# Allegro board a6321a-eval.brd
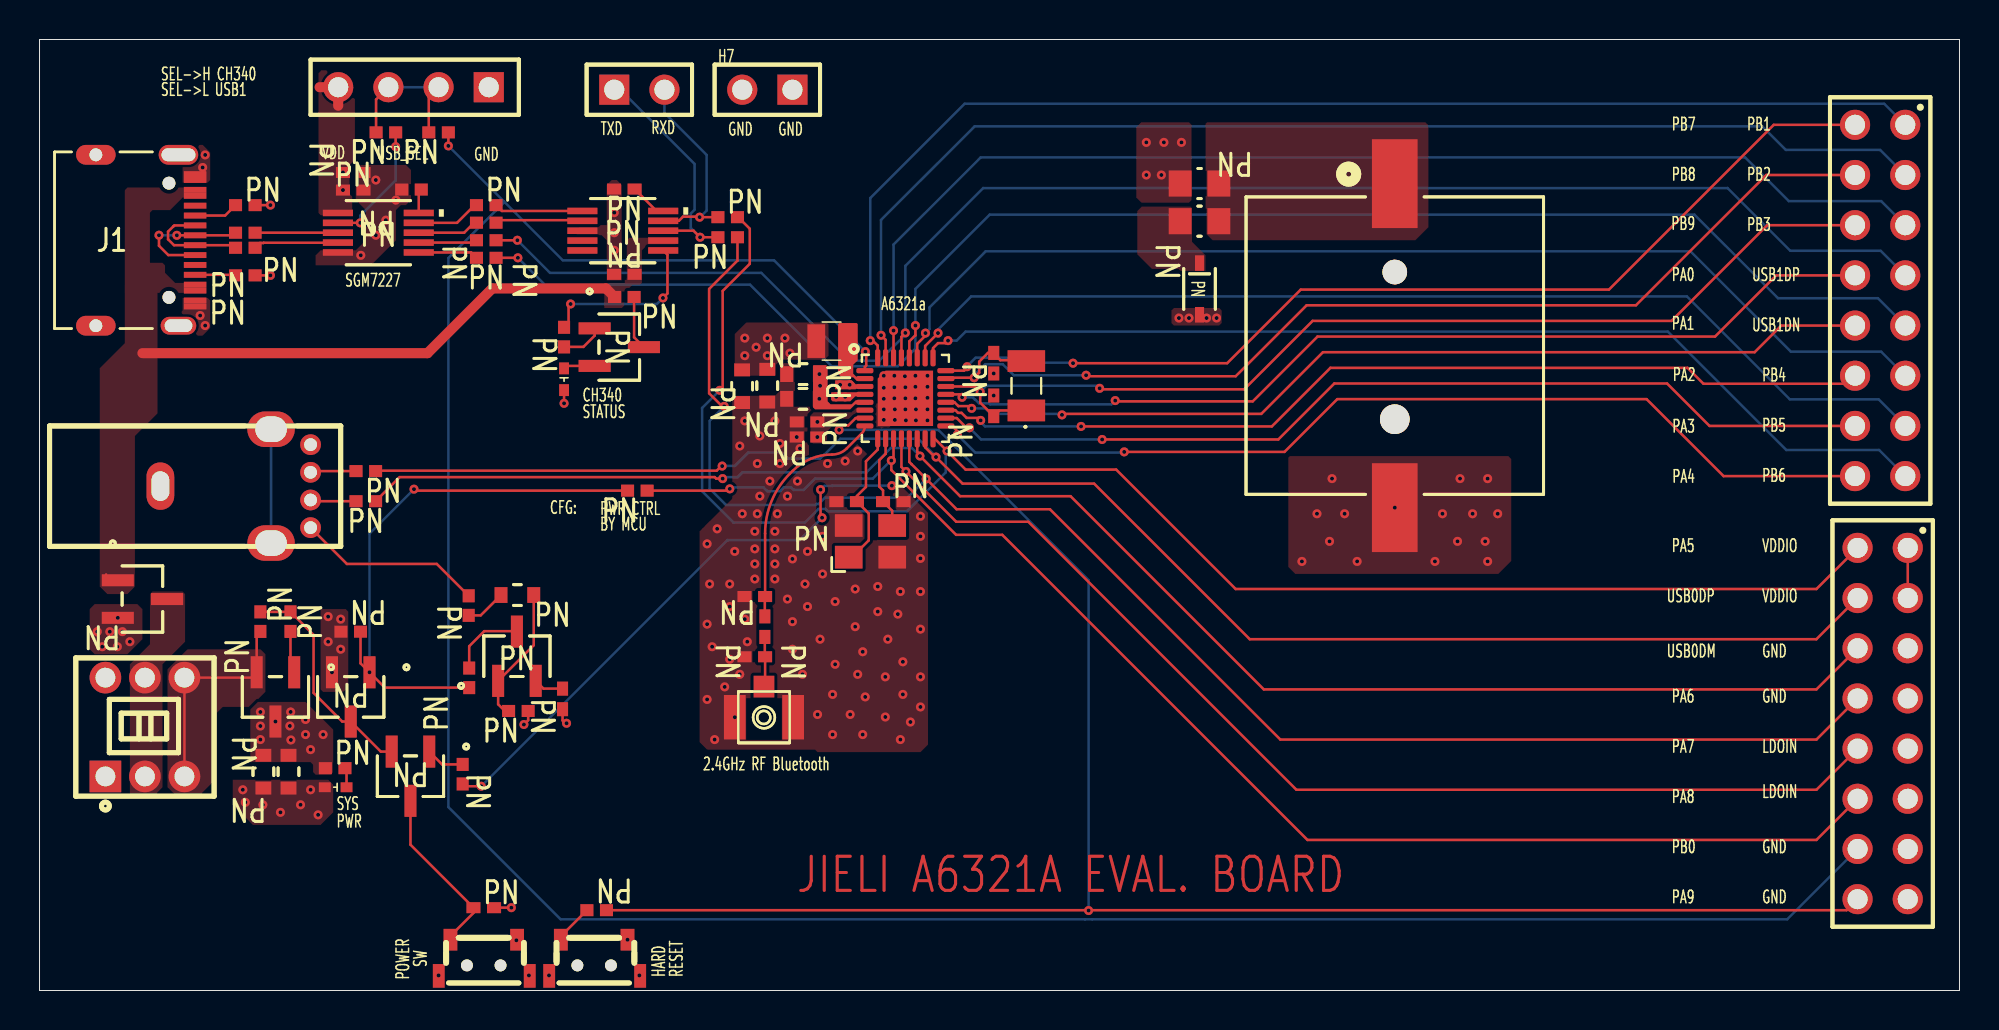
[diagram p0: board, top side]
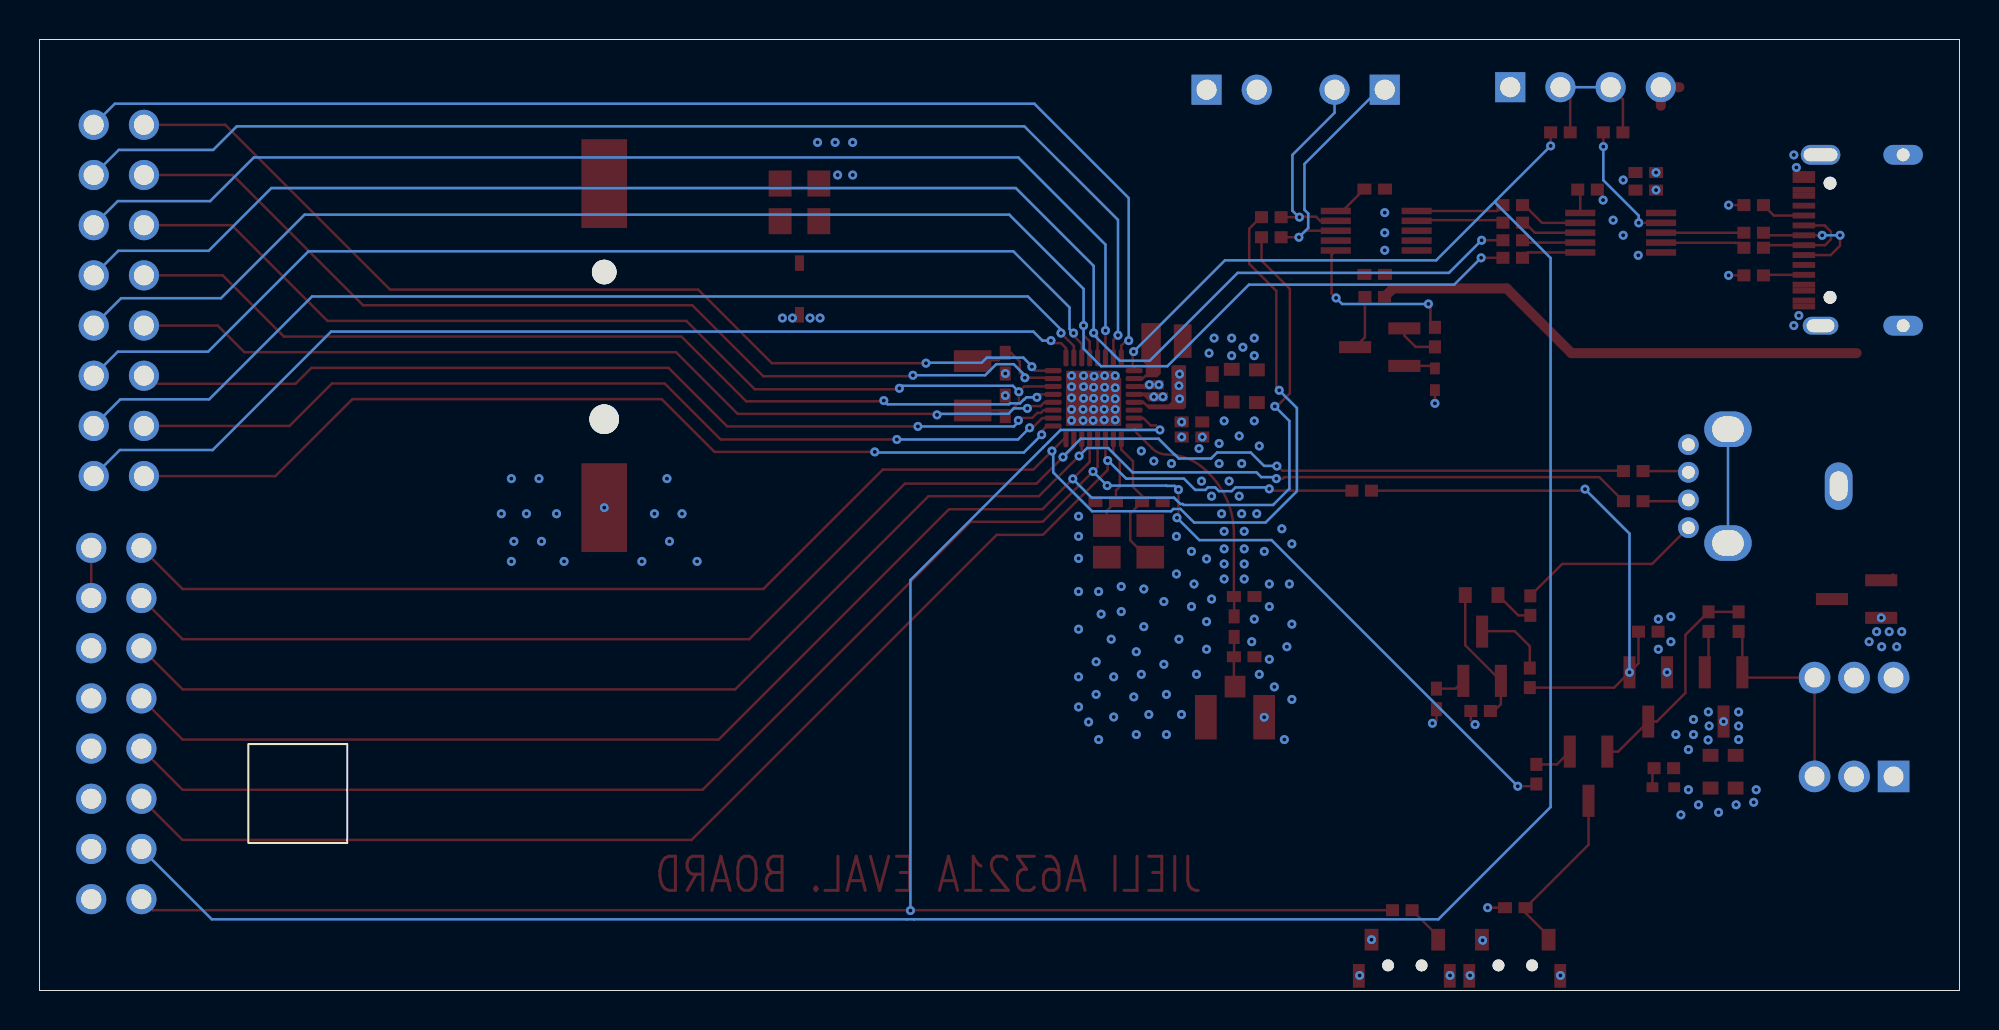
[diagram p1: board, bottom side, seen from below]

Outline 97.16 x 48.13 mm; copper layers: TOP, INNER1, INNER2, BOTTOM. Coordinates in mm from the lower left corner of the outline.
Outline path: 0,48.13 0,0 97.16,0 97.16,48.13 0,48.13

## Design rules (mm)
constraint set DEFAULT: min track width 0.127

## Placement (name value [footprint] x y rotation side)
BT1  LIR1220  [BAT_CR-1220_SOCKET]  68.58 32.64 0 top
C1  12pF(DNP)  [CAP_SMD_MLCC_0402]  40.84 24.74 0 top
C2  12pF(DNP)  [CAP_SMD_MLCC_0402]  43.2 24.74 0 top
C3  12pF(DNP)  [CAP_SMD_MLCC_0402]  48.29 29.59 90 top
C4  12pF(DNP)  [CAP_SMD_MLCC_0402]  48.29 31.75 270 top
C5  4.7uF  [CAP_SMD_MLCC_0402]  29.59 40.56 0 top
C6  4.7uF  [CAP_SMD_MLCC_0402]  29.59 36.25 180 top
C7  10uF  [CAP_SMD_MLCC_0603]  38.64 31.2 180 top
C8  10uF  [CAP_SMD_MLCC_0603]  38.63 29.95 180 top
C9  4.7uF  [CAP_SMD_MLCC_0402]  38.84 28.78 180 top
C10  4.7uF  [CAP_SMD_MLCC_0402]  38.84 28.01 180 top
C11  100nF  [CAP_SMD_MLCC_0402]  22.48 4.19 0 top
C12  10uF  [CAP_SMD_MLCC_0603]  24.18 20.02 0 top
C13  10uF  [CAP_SMD_MLCC_0603]  11.33 11.07 270 top
C14  10uF  [CAP_SMD_MLCC_0603]  12.6 11.07 270 top
C15  10uF  [CAP_SMD_MLCC_0603]  35.55 30.59 270 top
C16  10uF  [CAP_SMD_MLCC_0603]  36.82 30.61 270 top
C17  DNP  [CAP_SMD_MLCC_0402]  36.7 18.41 270 top
C18  NP0  [CAP_SMD_MLCC_0402]  36.2 16.89 0 top
C19  DNP  [CAP_SMD_MLCC_0402]  36.2 19.94 180 top
C20  4.7uF  [CAP_SMD_MLCC_0402]  26.47 14.76 270 top
C21  4.7uF  [CAP_SMD_MLCC_0402]  15.88 41.4 0 top
C22  4.7uF  [CAP_SMD_MLCC_0402]  15.88 40.51 0 top
D1  1N5819  [SOD-323]  58.7 35.51 270 top
D3  RED  [LED_SMD_0402_YX]  26.54 30.94 90 top
D4  RED  [LED_SMD_0402_YX]  14.99 10.29 0 top
D5  BAT54C/SOT  [SOT-23-3-M]  5.21 19.81 270 top
D6  BAT54C/SOT  [SOT-23-3-M]  18.77 10.85 180 top
H2  TYPE-A  [USB_FEMALE_SIDE_SHORT_TYPEA]  13.72 25.53 90 top
H3  Header 1x4  [HEADER_1X4_2R54_POLAR]  18.92 45.72 0 top
H4  Header 1x2  [HEADER_1X2_2R54_POLAR]  30.35 45.59 180 top
H5  Header 2x8  [HEADER_2X8_2R54]  93.14 34.92 270 top
H6  Header 2x8  [HEADER_2X8_2R54]  93.27 13.51 270 top
H7  Header 1x2  [HEADER_1X2_2R54_POLAR]  36.83 45.59 0 top
J1  Type-C 16 Pin  [USB_TYPEC_THC_16PIN]  7.62 37.97 270 top
J2  IPX Connector  [IPEX_3PIN]  36.66 13.83 180 top
J3  SW-SELFLOCK  [SW_SELF-LOCK_7X7MM]  5.33 13.34 0 top
L1  2.2uH  [IND_SMD_POW_CR252012]  40.11 32.87 90 top
Q1  S8050  [SOT-23-3-M]  29.34 32.56 270 top
Q2  AO3401  [SOT-23-3-M]  11.94 14.86 180 top
Q3  S8050  [SOT-23-3-M]  15.75 14.86 180 top
Q4  S8050  [SOT-23-3-M]  24.16 16.92 0 top
R1  1K(DNP)  [RES_SMD_0402-M]  28.19 4.06 180 top
R2  22R  [RES_SMD_0402-M]  16.51 24.77 0 top
R3  22R  [RES_SMD_0402-M]  16.51 26.29 0 top
R5  0R(DNP)  [RES_SMD_0805-M]  58.7 40.84 180 top
R6  0R(DNP)  [RES_SMD_0805-M]  58.7 38.94 0 top
R7  10k  [RES_SMD_0402-M]  18.82 40.54 180 top
R8  0R  [RES_SMD_0402-M]  10.41 37.59 0 top
R9  0R  [RES_SMD_0402-M]  10.41 38.35 0 top
R10  5.1k  [RES_SMD_0402-M]  10.41 39.75 0 top
R11  5.1k  [RES_SMD_0402-M]  10.41 36.2 0 top
R12  10k  [RES_SMD_0402-M]  29.59 35.1 0 top
R13  TBD  [RES_SMD_0402-M]  26.54 33.07 270 top
R14  10k  [RES_SMD_0402-M]  17.53 43.43 0 top
R15  10k  [RES_SMD_0402-M]  14.96 11.25 0 top
R16  TBD  [RES_SMD_0402-M]  34.82 38.13 0 top
R17  TBD  [RES_SMD_0402-M]  34.82 39.14 0 top
R18  0R  [RES_SMD_0402-M]  20.19 43.43 0 top
R19  0R  [RES_SMD_0402-M]  12.7 18.67 90 top
R20  10M  [RES_SMD_0402-M]  11.18 18.67 90 top
R21  10M  [RES_SMD_0402-M]  15.75 18.16 180 top
R22  100R  [RES_SMD_0402-M]  21.74 15.82 90 top
R23  10R  [RES_SMD_0402-M]  21.72 19.48 270 top
R24  10M  [RES_SMD_0402-M]  24.23 14.15 0 top
R25  0R  [RES_SMD_0402-M]  22.61 37.97 0 top
R26  0R  [RES_SMD_0402-M]  22.61 39.75 0 top
R27  0R  [RES_SMD_0402-M]  22.61 37.08 0 top
R28  0R  [RES_SMD_0402-M]  22.61 38.86 0 top
R29  0R  [RES_SMD_0402-M]  21.41 10.95 270 top
R30  0R  [RES_SMD_0402-M]  30.25 25.3 0 top
SW1  2345 Side Button  [BUTTON_SMD_SIDE_2435]  28.07 1.27 0 top
SW2  2345 Side Button  [BUTTON_SMD_SIDE_2435]  22.48 1.27 0 top
U1  AC6321A  [QFN32_4X4]  43.81 29.97 0 top
U2  SGM7227  [MSOP-10]  17.14 38.35 0 top
U3  CH340E  [MSOP-10]  29.51 38.46 0 top
XTAL1  24MHz 10ppm  [CRYSTAL_SMD_3225]  42.05 22.73 0 top
XTAL2  ?Hz  [CRYSTAL_SMD_3215]  49.94 30.61 90 top

## Library data of the parts
BT1 = BATTERY
C1-C6 C9-C11 C17-C22 = CAP-MLCC-0402-100nF-50V-10%-X7R: User Part Number: PN; Tolerance: 10%; tolerance: 10%
C7 C8 C12-C16 = CAP-MLCC-0603-10uF-10V-10%-X5R: User Part Number: PN; Tolerance: 10%; tolerance: 10%
D1 = DIODE-?V-?A-F?V-ARBTY: User Part Number: PN; Tolerance: TOL
D3 D4 = LED-ARBTY-COL-SIZE
D5 D6 = BAT54C/SOT: User Part Number: PN; Tolerance: TOL
H2 = USB-TYPEA-VERTICAL-SHORT
H3 = HEADER 1x4
H4 H7 = HEADER 1x2
H5 H6 = HEADER 2x8
J1 = TYPE-C_16_CON
J2 = IPEX_3PIN
J3 = SW-SELFLOCK
L1 = IND-?H-?A-?%-ARBTY: tolerance: ?%
Q1 Q3 Q4 = NPN-S8050-0.5A-J3Y: User Part Number: PN; Tolerance: TOL
Q2 = PMOS-AO3401-30V-4A: User Part Number: PN; Tolerance: TOL
R1-R3 R7-R30 = RES-0402-?R-1%-1/16W: User Part Number: PN; Tolerance: 1%; tolerance: 1%
R5 R6 = RES-0805-?R-1%-1/8W: User Part Number: PN; Tolerance: 1%; tolerance: 1%
SW1 SW2 = BUTTON_2435_SIDE
U1 = JL-A6321A
U2 = SGM7227: User Part Number: PN; Tolerance: TOL
U3 = CH340E: User Part Number: PN; Tolerance: TOL
XTAL1 = CRYSTAL-3225-?Hz
XTAL2 = CRYSTAL-3215-?Hz

## Footprints (pads in the part's own frame, mm; a bottom-side part is the same pattern mirrored in y, then rotated)
BAT_CR-1220_SOCKET
  round 1.245 hole 1.245: (0,3.725)
  round 1.499 hole 1.499: (0,-3.725)
  rect 2.311x4.496 smd: 1(0,8.2) 2(0,-8.2)
BUTTON_SMD_SIDE_2435
  round 0.6 hole 0.6 unplated: (-0.85,0) (0.85,0)
  rect 0.7x1.1 smd: 1(-1.687,1.3) 2(1.687,1.3)
  rect 0.6x1.2 smd: 3(2.327,-0.531) 4(-2.276,-0.531)
CAP_SMD_MLCC_0402
  rect 0.711x0.559 smd: 1(-0.521,0) 2(0.521,0)
CAP_SMD_MLCC_0603
  rect 0.656x0.8 smd: 1(-0.828,0) 2(0.828,0)
CRYSTAL_SMD_3215
  rect 1.1x1.9 smd: 1(-1.25,0) 2(1.25,0)
CRYSTAL_SMD_3225
  rect 1.4x1.15 smd: 1(-1.1,-0.8) 2(1.1,-0.8) 3(1.1,0.8) 4(-1.1,0.8)
HEADER_1X2_2R54_POLAR
  round 1.524 hole 1.016: 1(-1.27,0)
  rect 1.524x1.524 hole 1.016: 2(1.27,0)
HEADER_1X4_2R54_POLAR
  round 1.524 hole 1.016: 1(-3.81,0) 2(-1.27,0) 3(1.27,0)
  rect 1.524x1.524 hole 1.016: 4(3.81,0)
HEADER_2X8_2R54
  round 1.524 hole 1.016: 1(-8.89,-1.27) 2(-6.35,-1.27) 3(-3.81,-1.27) 4(-1.27,-1.27) 5(1.27,-1.27) 6(3.81,-1.27) 7(6.35,-1.27) 8(8.89,-1.27) 9(8.89,1.27) 10(6.35,1.27) 11(3.81,1.27) 12(1.27,1.27) 13(-1.27,1.27) 14(-3.81,1.27) 15(-6.35,1.27) 16(-8.89,1.27)
IND_SMD_POW_CR252012
  rect 1.7x0.9 smd: 1(0,0.8) 2(0,-0.8)
IPEX_3PIN
  rect 1.1x2.25 smd: 1(-1.475,0) 2(1.475,0)
  rect 1.05x1.1 smd: 3(0,-1.55)
LED_SMD_0402_YX
  rect 0.6x0.5 smd: A(0.55,0) C(-0.55,0)
MSOP-10
  rect 1.524x0.33 smd: 1(-2.045,1) 2(-2.045,0.5) 3(-2.045,0) 4(-2.045,-0.5) 5(-2.045,-1) 6(2.045,-1) 7(2.045,-0.5) 8(2.045,0) 9(2.045,0.5) 10(2.045,1)
QFN32_4X4
  custom 0.86x0.26 smd: 1(-2.05,1.4) 2(-2.05,1) 3(-2.05,0.6) 4(-2.05,0.2) 5(-2.05,-0.2) 6(-2.05,-0.6) 7(-2.05,-1) 8(-2.05,-1.4) 17(2.05,-1.4) 18(2.05,-1) 19(2.05,-0.6) 20(2.05,-0.2) 21(2.05,0.2) 22(2.05,0.6) 23(2.05,1) 24(2.05,1.4)
  custom 0.26x0.86 smd: 9(-1.4,-2.05) 10(-1,-2.05) 11(-0.6,-2.05) 12(-0.2,-2.05) 13(0.2,-2.05) 14(0.6,-2.05) 15(1,-2.05) 16(1.4,-2.05) 25(1.4,2.05) 26(1,2.05) 27(0.6,2.05) 28(0.2,2.05) 29(-0.2,2.05) 30(-0.6,2.05) 31(-1,2.05) 32(-1.4,2.05)
  custom 2.8x2.8 smd: 33(0,0)
RES_SMD_0402-M
  rect 0.66x0.61 smd: 1(-0.495,0) 2(0.495,0)
RES_SMD_0805-M
  rect 1.159x1.321 smd: 1(-0.979,0) 2(0.979,0)
SOD-323
  rect 0.787x0.457 smd: 1(-1.308,0) 2(1.308,0)
SOT-23-3-M
  rect 0.61x1.626 smd: 1(-0.95,-1.246) 2(0.95,-1.246) 3(0,1.246)
SW_SELF-LOCK_7X7MM
  rect 1.6x1.6 hole 1: 1(-2,-2.5)
  round 1.6 hole 1: 2(0,-2.5) 3(2,-2.5) 4(-2,2.5) 5(0,2.5) 6(2,2.5)
USB_FEMALE_SIDE_SHORT_TYPEA
  round 1.05 hole 0.65: 1(-2.1,0) 2(-0.7,0) 3(0.7,0) 4(2.1,0)
  oval 1.8x2.4 hole 1.3x1.6: 5(-2.88,2) 6(2.88,2)
  oval 2.4x1.4 hole 1.5x0.9: 7(0,7.6)
USB_TYPEC_THC_16PIN
  round 0.65 hole 0.65 unplated: (-2.89,-1.07) (2.89,-1.07)
  rect 0.3x1.14 smd: A1(-3.35,0.254) A4(-2.55,0.254) A5(-1.25,0.254) A6(-0.25,0.254) A7(0.25,0.254) A8(1.25,0.254) A9(2.55,0.254) A12(3.35,0.254) B1(3.05,0.254) B4(2.25,0.254) B5(1.75,0.254) B6(0.75,0.254) B7(-0.75,0.254) B8(-1.75,0.254) B9(-2.25,0.254) B12(-3.05,0.254)
  oval 1x2 hole 0.65x1.72: S1(-4.325,-0.59)
  oval 0.9x1.8 hole 0.65x1.4: S2(4.325,-0.59)
  oval 1x2 hole 0.65: S3(-4.325,-4.77) S4(4.325,-4.77)

## Nets
GND: BT1.2(-) C1.1 C2.2 C3.2 C4.2 C5.1 C6.2 C7.2 C8.2 C9.2 C10.2 C11.2 C13.2 C14.2 C15.2 C16.2 C18.1 C19.2 C20.2 C21.2 C22.2 D3.C D4.C H2.4 H2.5 H2.6 H2.7 H3.4 H6.9 H6.10 H6.13 H6.14 H7.1 H7.2 J1.A1 J1.A12 J1.B1 J1.B12 J1.S1 J1.S2 J1.S3 J1.S4 J2.1 J2.2 Q3.2(E) R7.2 R10.2 R11.2 R21.2 R24.2 SW1.2 SW1.3 SW1.4 SW2.2 SW2.3 SW2.4 U1.33 U2.5 U3.3 XTAL1.2 XTAL1.4
VBAT: D1.2 U1.3
VBAT_COIN: BT1.1 R5.1 R6.2
VBUS_4V5: D5.2(C2) H2.1(V+) R23.1
VBUS_5V: C6.1 D5.1 J1.A4 J1.A9 J1.B4 J1.B9(VBUS_B#B9) R12.1 U3.7(VCC)
VDDIO: C7.1 C8.1 C21.1 C22.1 H3.1 H6.15 H6.16 R5.2 U1.5(VDDIO) U2.1(VCC)
BT_AVDD: C9.1 C10.1 C15.1 C16.1 L1.1 U1.6
BT_RF: C17.1 C19.1 U1.8
BTOSCI: C1.2 U1.9 XTAL1.1
BTOSCO: C2.1 U1.10 XTAL1.3
CH340_DM: R28.2 U3.2
CH340_DP: R26.2 U3.1
CH340_RXD: H4.1 R17.1 U3.9
CH340_TXD: H4.2 R16.1 U3.8
LDOIN: C13.1 C14.1 H6.11 H6.12 Q2.3 R15.1 U1.4
PA0: H5.4 U1.21
PA1: H5.5 U1.20
PA2: H5.6 U1.19
PA3: H5.7 U1.18
PA4: H5.8 U1.17
PA5: H6.1 R17.2 U1.16
PA6: H6.4 R16.2 U1.13
PA7: H6.5 R29.2 U1.12
PA8: H6.6 R30.2 U1.11
PA9: H6.8 R1.1 U1.7
PB0: H6.7 R18.2 U1.1
PB1: H5.16 U1.32
PB2: H5.15 U1.31
PB3: H5.14 U1.30
PB4: H5.11 U1.27
PB5: H5.10 U1.26
PB6: H5.9 U1.25
PB7: H5.1 U1.24
PB8: C4.1 H5.2 U1.23 XTAL2.2
PB9: C3.1 H5.3 U1.22 XTAL2.1
PWR_CTRL: Q3.1 R21.1 R22.1 R30.1
PWR_DETCT: D6.1 R29.1
SW: L1.2 U1.2
USB0DM: H6.3 R2.2 U1.14
USB0DP: H6.2 R3.2 U1.15
USB1DM: H5.12 R27.2 U1.28
USB1DP: H5.13 R25.2 U1.29
USB_DUPLEX1_DM: R8.2 U2.4
USB_DUPLEX1_DP: R9.2 U2.3
USB_SEL: H3.2 H3.3 R14.1 R18.1
N03414: R1.2 SW1.1
N03782: H2.2 R2.1
N03786: H2.3 R3.1
N07052: D1.1(K) R6.1
N07391: R7.1 U2.10
N08245: J1.A5 R10.1
N08312: J1.A6 J1.B6 R9.1
N08349: J1.A7 J1.B7 R8.1
N09487: J1.B5 R11.1
N10980: R14.2 U2.2
N11301: C5.2 U3.10
N12450: Q1.3 R12.2
N12671: D3.A Q1.2(E)
N13607: Q1.1 R13.2
N13611: R13.1 U3.6
N16887: D4.A R15.2
N23891: J3.3 J3.6 Q2.2(S) R20.1
N23993: D6.2(C2) Q3.3 R19.2 R20.2
N24001: Q2.1 R19.1
N25149: C11.1 D6.3 SW2.1
N26855: C12.2 Q4.1 R24.1
N27586: C12.1 R23.2
N31213: R26.1 U2.9
N31217: R25.1 U2.7
N31225: R27.1 U2.6
N31229: R28.1 U2.8
N34764: C17.2 C18.2 J2.3(SIG)
N38093: D5.3 J3.2 J3.5
N39913: C20.1 Q4.2(E)
N266131: Q4.3 R22.2

Pads without a net: J1 A8 B8; J3 1 4; U3 4 5

## Via types
v1: diameter 0.457, hole 0.203, TOP to BOTTOM, 263 vias

## Routing (per net, layer and track width the routed paths; a pad name or vN(x,y) marks a point on that pad's centre or on a via; arc(x,y) is an arc through that point)
GND: length 120.2
  TOP w0.127: C11.2 v1(23.88,4.19) ; R10.2 v1(11.68,39.75) ; R24.2 24.73,13.68 v1(24.51,13.46) ; v1(26.67,13.53) 26.67,13.59 26.67,13.59 26.54,13.59 26.47,13.67 C20.2 ; R11.2 v1(11.68,36.2) ; D3.C v1(26.54,29.72)
  INNER1 w0.508: 5.95,33.65 J1.S2 ; J1.S2 8.11,33.65 ; J1.S2 7.03,34.28 ; J1.S2 7.03,33.02 ; 38.1,44.65 H7.2 ; H7.2 39.04,45.59 ; H7.2 37.16,45.59 ; H7.2 38.1,46.53 ; H6.14 95.48,17.32 ; H6.14 94.54,18.26 ; H6.14 94.54,16.38 ; H6.14 93.6,17.32 ; 13.01,27.63 H2.4 ; H2.4 14.42,27.63 ; H2.4 13.72,28.33 ; 5.85,42.3 J1.S1 ; J1.S1 8.21,42.3 ; J1.S1 7.03,42.98 ; J1.S1 7.03,41.62 ; 93.6,7.16 H6.10 ; H6.10 95.48,7.16 ; H6.10 94.54,8.1 ; H6.10 94.54,6.22 ; 22.73,44.78 H3.4 ; H3.4 22.73,46.66 ; H3.4 21.79,45.72 ; H3.4 23.67,45.72 ; 10.34,28.41 H2.6 ; H2.6 11.72,27.33 ; H2.6 13.09,28.41 ; H2.6 11.72,29.49 ; 94.54,3.68 H6.9 ; H6.9 93.6,4.62 ; H6.9 94.54,5.56 ; H6.9 95.48,4.62 ; 94.54,13.84 H6.13 ; H6.13 94.54,15.72 ; H6.13 95.48,14.78 ; H6.13 93.6,14.78 ; 10.34,22.65 H2.5 ; H2.5 11.72,23.72 ; H2.5 11.72,21.57 ; H2.5 13.09,22.65 ; J1.S3 4.03,42.3 ; J1.S3 2.85,42.98 ; J1.S3 2.85,41.62 ; J1.S3 1.67,42.3 ; 34.62,45.59 H7.1 ; H7.1 35.56,44.65 ; H7.1 35.56,46.53 ; H7.1 36.5,45.59 ; 5.24,25.53 H2.7 ; H2.7 6.99,25.53 ; H2.7 6.12,24.15 ; H2.7 6.12,26.9 ; 2.85,32.97 J1.S4 ; J1.S4 1.67,33.65 ; J1.S4 4.03,33.65 ; J1.S4 2.85,34.33
  INNER2 w0.508: H7.1 35.56,46.53 ; H7.1 35.56,44.65 ; H7.1 36.5,45.59 ; H7.1 34.62,45.59 ; J1.S3 4.03,42.3 ; J1.S3 2.85,41.62 ; J1.S3 2.85,42.98 ; J1.S3 1.67,42.3 ; 10.34,28.41 H2.6 ; H2.6 11.72,27.33 ; H2.6 11.72,29.49 ; H2.6 13.09,28.41 ; H3.4 22.73,46.66 ; H3.4 21.79,45.72 ; H3.4 23.67,45.72 ; H3.4 22.73,44.78 ; 38.1,44.65 H7.2 ; H7.2 39.04,45.59 ; H7.2 37.16,45.59 ; H7.2 38.1,46.53 ; 93.6,4.62 H6.9 ; H6.9 94.54,3.68 ; H6.9 95.48,4.62 ; H6.9 94.54,5.56 ; 7.03,41.62 J1.S1 ; J1.S1 8.21,42.3 ; J1.S1 7.03,42.98 ; J1.S1 5.85,42.3 ; 93.6,7.16 H6.10 ; H6.10 95.48,7.16 ; H6.10 94.54,6.22 ; H6.10 94.54,8.1 ; 94.54,13.84 H6.13 ; H6.13 95.48,14.78 ; H6.13 93.6,14.78 ; H6.13 94.54,15.72 ; J1.S2 7.03,34.28 ; J1.S2 7.03,33.02 ; J1.S2 5.95,33.65 ; J1.S2 8.11,33.65 ; 2.85,32.97 J1.S4 ; J1.S4 4.03,33.65 ; J1.S4 2.85,34.33 ; J1.S4 1.67,33.65 ; 6.12,24.15 H2.7 ; H2.7 5.24,25.53 ; H2.7 6.99,25.53 ; H2.7 6.12,26.9 ; H6.14 94.54,18.26 ; H6.14 94.54,16.38 ; H6.14 95.48,17.32 ; H6.14 93.6,17.32 ; H2.4 13.72,28.33 ; H2.4 13.01,27.63 ; H2.4 14.42,27.63
  BOTTOM w0.127: H2.5 H2.6
  vias: v1(8.13,34.16) v1(8.25,41.66) v1(8.38,42.29) v1(8.38,33.66) v1(10.29,10.16) v1(10.41,9.53) v1(11.3,9.4) v1(12.19,9.02) v1(13.21,9.4) v1(13.72,10.16) v1(14.1,8.89) v1(14.6,18.92) v1(14.6,17.65) v1(14.8,16.11) v1(15.24,18.8) v1(15.24,17.27) v1(16.26,37.21) v1(17.02,41.02) v1(17.02,38.23) v1(17.53,38.99) v1(18.03,40) v1(20.19,0.76) v1(24.13,2.54) v1(24.76,0.76) v1(25.78,0.76) v1(29.08,39.37) v1(29.08,38.35) v1(29.08,37.47) v1(29.75,2.57) v1(30.35,0.76) v1(33.78,22.61) v1(33.78,18.54) v1(33.78,14.73) v1(33.91,20.57) v1(34.04,17.4) v1(34.16,12.7) v1(34.29,23.37) v1(34.67,15.37) v1(34.92,20.57) v1(34.92,19.43) v1(34.92,16.76) v1(35.18,22.23) v1(35.18,13.83) v1(35.43,27.56) v1(35.43,16) v1(35.56,24.13) v1(35.69,28.83) v1(35.69,18.8) v1(35.81,17.65) v1(36.2,23.24) v1(36.2,22.35) v1(36.2,21.59) v1(36.2,20.83) v1(36.32,26.67) v1(36.32,24.13) v1(36.45,28.07) v1(36.45,25.02) v1(36.96,25.78) v1(37.21,28.83) v1(37.21,23.24) v1(37.21,22.35) v1(37.21,21.59) v1(37.21,20.83) v1(37.34,24.13) v1(37.46,27.69) v1(37.46,26.67) v1(37.85,25.02) v1(37.85,19.81) v1(38.1,21.84) v1(38.1,18.67) v1(38.1,17.27) v1(38.32,28.01) v1(38.35,25.78) v1(38.48,27.43) v1(38.61,16) v1(38.73,20.57) v1(38.86,22.23) v1(38.86,19.43) v1(39.37,13.97) v1(39.5,17.78) v1(39.62,22.99) v1(39.62,21.08) v1(39.88,26.67) v1(40.13,14.99) v1(40.13,12.95) v1(40.26,19.69) v1(40.26,16.51) v1(40.77,26.8) v1(41.02,13.97) v1(41.27,20.32) v1(41.27,18.41) v1(41.4,27.3) v1(41.4,16) v1(41.66,17.14) v1(41.66,12.95) v1(41.78,14.86) v1(42.42,20.45) v1(42.42,19.18) v1(42.72,31.12) v1(42.72,30.51) v1(42.72,29.95) v1(42.72,29.41) v1(42.72,28.88) v1(42.8,15.88) v1(42.8,13.84) v1(42.93,17.78) v1(43.26,31.12) v1(43.26,30.53) v1(43.26,29.97) v1(43.28,29.41) v1(43.28,28.88) v1(43.43,19.05) v1(43.56,20.19) v1(43.56,12.7) v1(43.69,16.64) v1(43.69,14.99) v1(43.79,31.09) v1(43.81,30.53) v1(43.81,29.97) v1(43.81,29.41) v1(43.84,28.85) v1(44.07,13.59) v1(44.32,31.12) v1(44.32,30.56) v1(44.32,29.97) v1(44.35,29.41) v1(44.35,28.85) v1(44.58,24) v1(44.58,22.99) v1(44.58,21.87) v1(44.58,20.19) v1(44.58,18.29) v1(44.58,15.88) v1(44.58,14.35) v1(44.93,31.12) v1(44.93,30.56) v1(44.93,30) v1(44.93,29.41) v1(44.93,28.85) v1(48.29,31.23) v1(48.29,30.11) v1(63.88,21.72) v1(64.64,24.13) v1(65.28,22.73) v1(65.41,25.91) v1(66.04,24.13) v1(66.67,21.72) v1(68.58,24.44) v1(70.61,21.72) v1(70.99,24.13) v1(71.75,22.73) v1(71.88,25.91) v1(72.52,24.13) v1(73.15,22.73) v1(73.28,25.91) v1(73.28,21.72) v1(73.79,24.13)
VBAT:
  vias: v1(40.51,30.66) v1(41,30.66) v1(57.66,34.04) v1(58.17,34.04) v1(59.05,34.04) v1(59.56,34.04)
VBUS_4V5: length 10.8
  TOP w0.127: R23.1 20.1,21.59 15.55,21.59 H2.1
  INNER2 w0.508: 13.72,22.72 H2.1 14.42,23.43
  vias: v1(2.92,18.16) v1(3.17,17.4) v1(3.56,18.16) v1(3.96,18.86) v1(3.94,17.4) v1(4.19,18.16) v1(4.57,17.65)
VBUS_5V: length 25.5
  TOP w0.127: 3.37,21.02 3.37,21.06
  TOP w0.508: 5.21,32.26 19.63,32.26 22.91,35.53 28.66,35.53 R12.1
VDDIO: length 13
  TOP w0.127: H6.16 H6.15
  TOP w0.508: 15.11,44.78 H3.1 14.17,45.72
  INNER2 w0.127: v1(56.77,41.28) v1(56.01,41.28) ; 92.3,24.64 H6.16
  INNER2 w0.508: 94.54,21.46 H6.16 ; H6.16 94.54,23.34 ; H6.16 95.48,22.4 ; 94.54,20.8 H6.15 95.48,19.86
  vias: v1(15.35,41.4) v1(15.35,40.51) v1(39.47,31.2) v1(39.5,30.61) v1(39.46,29.95) v1(56.01,42.93) v1(56.9,42.93) v1(57.78,42.93)
BT_AVDD:
  vias: v1(35.69,33.02) v1(35.69,32.13) v1(36.26,32.56) v1(36.83,33.02) v1(36.83,32.13) v1(37.72,33.02) v1(37.97,32.26) v1(39.36,28.78) v1(39.36,28.01)
BT_RF: length 12.3
  TOP w0.127: C17.1 36.7,19.93 C19.1 36.72,23.13 arc(37.04,24.77) 37.97,26.16 38.11,26.3 arc(39.03,26.91) 40.11,27.13 arc(40.51,27.21) 40.84,27.43 41.61,28.2 arc(41.72,28.37) U1.8
BTOSCI: length 7.2
  TOP w0.127: U1.9 42.42,27.38 41.82,26.78 41.82,25.49 41.36,25.03 C1.2 41.96,24.15 41.96,22.78 41.11,21.93 XTAL1.1
BTOSCO: length 4.8
  TOP w0.127: XTAL1.3 43.15,24.28 C2.1 42.68,25.31 42.49,25.5 42.49,26.84 42.82,27.16 U1.10
CH340_DM: length 4.4
  TOP w0.127: R28.2 23.23,38.99 27.44,38.99 U3.2
CH340_DP: length 4.5
  TOP w0.127: U3.1 23.4,39.46 R26.2
CH340_RXD: length 10.4
  TOP w0.127: U3.9 32.35,38.96 32.56,39.17 33.38,39.17 v1(33.4,39.14) R17.1
  BOTTOM w0.127: v1(33.4,39.14) 33.43,39.14 33.76,39.47 33.76,42.29 31.62,44.42 H4.1
CH340_TXD: length 12.5
  TOP w0.127: R16.1 v1(33.43,38.13) 33.1,38.46 U3.8
  BOTTOM w0.127: v1(33.43,38.13) 32.96,38.6 32.96,39.33 33.15,39.52 33.15,41.83 29.39,45.59 H4.2
LDOIN: length 5.6
  INNER2 w0.508: H6.11 94.54,10.64 ; H6.11 93.6,9.7 ; H6.11 95.48,9.7 ; 93.6,12.24 H6.12 ; H6.12 95.48,12.24 ; H6.12 94.54,11.3
  vias: v1(11.18,14.1) v1(11.18,13.39) v1(11.18,12.7) v1(11.94,13.61) v1(12.71,14.1) v1(12.67,13.39) v1(12.72,12.68) v1(13.46,13.72) v1(13.46,12.95) v1(13.72,12.19) v1(14.35,12.95) v1(40.31,30.05) v1(40.77,30.05)
PA0: length 49
  TOP w0.127: v1(46.69,30.02) 46.54,30.17 U1.21 ; v1(54.43,29.86) 54.47,29.82 61.39,29.82 64.67,33.1 84.79,33.1 87.88,36.2 H5.4
  BOTTOM w0.127: v1(54.43,29.86) 54.24,29.67 48.1,29.67 48.05,29.72 47.54,29.72 47.35,29.91 47.33,29.91 47.22,30.02 v1(46.69,30.02)
PA1: length 48.1
  TOP w0.127: v1(51.74,29.13) 51.79,29.18 61.82,29.18 64.95,32.31 86.79,32.31 88.14,33.66 H5.5 ; U1.20 46.3,29.77 46.49,29.58 47.05,29.58 v1(47.17,29.46)
  BOTTOM w0.127: v1(47.17,29.46) 47.85,29.46 48.13,29.18 51.69,29.18 v1(51.74,29.13)
PA2: length 48.1
  TOP w0.127: v1(47.62,28.85) 47.5,28.98 46.91,28.98 46.66,29.24 46.48,29.24 46.34,29.37 U1.19 ; H5.6 91.47,30.71 84.2,30.71 83.4,31.51 65.32,31.51 62.36,28.55 v1(52.7,28.55)
  BOTTOM w0.127: v1(52.7,28.55) 47.85,28.55 47.62,28.77 v1(47.62,28.85)
PA3: length 48.7
  TOP w0.127: H5.7 84.51,28.57 82.36,30.72 65.52,30.72 62.69,27.89 v1(53.77,27.89) ; U1.18 46.42,28.97 46.89,28.5 47.02,28.5 47.07,28.55 47.12,28.55 47.12,28.48 v1(47.05,28.48)
  BOTTOM w0.127: v1(53.77,27.89) 47.64,27.89 v1(47.05,28.48)
PA4: length 49.4
  TOP w0.127: H5.8 85.22,26.04 81.32,29.93 65.67,29.93 63,27.26 v1(54.89,27.26) ; U1.17 46.18,28.57 46.44,28.31 v1(46.44,28.13)
  BOTTOM w0.127: v1(54.89,27.26) 54.86,27.23 47.35,27.23 v1(46.44,28.13)
PA5: length 81.2
  TOP w0.127: U1.16 45.31,27.92 v1(45.92,27.3) 46.86,26.37 54.48,26.37 60.53,20.32 89.92,20.32 H6.1 ; 35.34,39.16 35.94,38.56 35.94,36.78 34.57,35.41 34.57,30.52 v1(34.42,30.38) ; 35.34,39.16 35.34,39.16 ; 35.34,39.16 R17.2
  BOTTOM w0.127: v1(34.42,30.38) 33.53,29.48 33.53,25.27 35.12,23.69 38.73,23.69 39.41,24.37 39.78,24.37 39.9,24.26 43.89,24.26 45.86,26.23 45.86,27.24 v1(45.92,27.3)
PA6: length 81.7
  TOP w0.127: v1(34.65,29.57) 34.54,29.57 33.88,30.23 33.88,35.51 35.32,36.94 R16.2 ; U1.13 44.01,26.75 44.12,26.64 44.12,26.64 v1(44.87,25.89) 46.4,24.36 51.13,24.36 62.79,12.7 89.92,12.7 H6.4
  BOTTOM w0.127: v1(44.87,25.89) 43.92,24.94 39.74,24.94 39.43,24.63 39.31,24.63 39.26,24.57 34.73,24.57 33.91,25.4 33.91,28.83 v1(34.65,29.57)
PA7: length 87.5
  TOP w0.127: U1.12 43.62,26.5 v1(43.84,26.27) 46.39,23.72 50.04,23.72 63.6,10.16 89.92,10.16 H6.5 ; R29.2 21.53,10.34 v1(22.35,10.34) ; v1(39.6,23.93) 39.52,24 v1(39.52,25.35)
  BOTTOM w0.127: v1(22.35,10.34) 34.81,22.8 38.47,22.8 v1(39.6,23.93) ; v1(43.84,26.27) v1(43.13,25.55) 40.14,25.55 40.12,25.54 39.71,25.54 v1(39.52,25.35)
PA8: length 72.4
  TOP w0.127: R30.2 34.82,25.3 34.92,25.39 34.92,25.39 v1(34.93,25.39) ; H6.6 89.92,7.62 64.16,7.62 48.72,23.06 46.38,23.06 43.1,26.34 v1(43.1,26.82) 43.22,26.93 U1.11
  BOTTOM w0.127: v1(43.1,26.82) 43.09,26.83 43.09,26.83 42.16,25.91 39.24,25.91 38.67,25.34 38.16,25.34 38.03,25.46 37.66,25.46 37.47,25.27 36.82,25.27 36.63,25.46 34.99,25.46 34.92,25.4 34.93,25.39 v1(34.93,25.39)
PA9: length 97.6
  TOP w0.127: 53.09,4.06 53.08,4.06 R1.1 ; 53.09,4.06 v1(53.09,4.05) ; 53.09,4.06 53.09,4.06 91.44,4.06 H6.8 ; U1.7 41.3,28.97 40.93,28.6 40.67,28.6 40.46,28.4 v1(40.46,28.37)
  BOTTOM w0.127: v1(53.09,4.05) 53.09,20.77 46.37,27.49 45.48,28.37 v1(40.46,28.37)
PB0: length 134.1
  TOP w0.127: v1(41.79,32.34) 41.83,32.34 41.83,32.33 41.83,31.62 41.76,31.55 U1.1 ; R18.2 v1(20.69,42.75)
  BOTTOM w0.127: 23.49,39.94 26.48,36.96 37.17,36.96 v1(41.79,32.34) ; 23.49,39.94 20.69,42.75 v1(20.69,42.75) ; 23.49,39.94 23.49,39.88 20.69,37.07 20.69,9.28 26.37,3.6 88.44,3.6 H6.7
PB1: length 63.3
  TOP w0.127: 41.94,32.99 v1(42.04,32.89) 42.16,32.89 42.42,32.64 U1.32
  BOTTOM w0.127: H5.16 93.34,44.88 46.81,44.88 42.04,40.11 v1(42.04,32.89)
PB2: length 61.9
  TOP w0.127: U1.31 42.82,32.93 v1(42.58,33.17)
  BOTTOM w0.127: H5.15 93.14,42.55 88.37,42.55 87.17,43.74 47.32,43.74 42.58,39 v1(42.58,33.17)
PB3: length 60.2
  TOP w0.127: U1.30 v1(43.22,33.4)
  BOTTOM w0.127: H5.14 93.19,39.95 88.52,39.95 86.31,42.16 47.62,42.16 43.22,37.75 v1(43.22,33.4)
PB4: length 56
  TOP w0.127: v1(44.83,33.27) 44.83,33.15 44.41,32.73 U1.27
  BOTTOM w0.127: H5.11 93.19,32.33 88.62,32.33 83.54,37.41 47.88,37.41 45.03,34.57 45.03,33.48 v1(44.83,33.27)
PB5: length 54.1
  TOP w0.127: v1(45.47,33.27) 44.81,32.62 U1.26
  BOTTOM w0.127: H5.10 93.07,29.92 88.57,29.92 83.36,35.13 47.14,35.13 45.47,33.45 v1(45.47,33.27)
PB6: length 53.1
  TOP w0.127: v1(45.97,32.89) 45.85,32.77 45.47,32.77 45.21,32.51 U1.25
  BOTTOM w0.127: v1(45.97,32.89) 46.41,32.89 46.86,33.35 82.4,33.35 88.39,27.36 93.09,27.36 H5.9
PB7: length 51.4
  TOP w0.127: v1(52.3,31.75) 60.1,31.75 63.82,35.47 79.42,35.47 87.76,43.81 H5.1 ; v1(46.94,31.57) 46.94,31.52 46.79,31.37 U1.24
  BOTTOM w0.127: v1(52.3,31.75) 52.27,31.78 49.48,31.78 49.23,32.03 47.37,32.03 46.94,31.6 v1(46.94,31.57)
PB8: length 54.5
  TOP w0.127: H5.2 87.38,41.28 80.78,34.68 64.12,34.68 60.53,31.09 53.01,31.09 v1(52.96,31.14) ; XTAL2.2 49.89,31.9 48.62,31.9 48.29,32.23 C4.1 47.99,32.27 47.55,31.83 47.55,31.27 v1(47.29,31.01) 45.91,31.01 U1.23
  BOTTOM w0.127: v1(47.29,31.01) 47.29,31.14 47.85,31.7 48.74,31.7 49.3,31.14 v1(52.96,31.14)
PB9: length 53
  TOP w0.127: U1.22 47.14,30.57 47.15,30.57 47.33,30.57 v1(47.6,30.3) 47.6,29.76 C3.1 48.57,29.36 XTAL2.1 ; H5.3 87.43,38.73 82.58,33.89 64.42,33.89 60.96,30.43 53.7,30.43 v1(53.64,30.48)
  BOTTOM w0.127: v1(47.6,30.3) 47.9,30.61 53.52,30.61 v1(53.64,30.48)
PWR_CTRL: length 28.7
  TOP w0.127: R30.1 19.02,25.3 v1(18.95,25.37) ; R21.1 16.24,16.56 v1(16.7,16.11) 17.47,15.33 R22.1
  BOTTOM w0.127: v1(18.95,25.37) 16.7,23.12 v1(16.7,16.11)
PWR_DETCT: length 2
  TOP w0.127: R29.1 20.37,11.44 D6.1
USB0DM: length 83
  TOP w0.127: H6.3 89.92,15.24 61.95,15.24 52.17,25.02 46.58,25.02 v1(44.55,27.05) 44.55,27.13 44.41,27.26 U1.14 ; R2.2 18.22,25.98 34.16,25.98 34.24,25.91 v1(34.57,25.91)
  BOTTOM w0.127: v1(34.57,25.91) 34.64,25.91 34.71,25.98 35.33,25.98 35.57,26.23 41.85,26.23 43.08,27.46 44.15,27.46 v1(44.55,27.05)
USB0DP: length 82.2
  TOP w0.127: U1.15 44.81,27.49 45.31,27 v1(45.36,27) 46.71,25.65 53.37,25.65 61.24,17.78 89.92,17.78 H6.2 ; R3.2 17.03,26.31 34.26,26.31 34.49,26.53 34.53,26.53 v1(34.54,26.54)
  BOTTOM w0.127: v1(45.36,27) 45.36,27.03 44.46,27.93 40.53,27.93 39.71,27.11 39.69,27.11 39.5,26.92 37.87,26.92 37.57,27.23 35.86,27.23 35.19,26.55 34.55,26.55 v1(34.54,26.54)
USB1DM: length 82.7
  TOP w0.127: v1(24.21,37.08) R27.2 ; U1.28 44.01,32.86 44.32,33.16 v1(44.32,33.66) 44.27,33.71
  BOTTOM w0.127: H5.12 93.03,35.04 87.97,35.04 83.74,39.27 48.08,39.27 44.32,35.51 v1(44.32,33.66) 44.32,32.49 43.43,31.6 40.08,31.6 35.95,35.73 25.57,35.73 v1(24.21,37.08)
USB1DP: length 82.7
  TOP w0.127: v1(43.81,33.28) 43.62,33.09 U1.29 ; v1(24.18,37.97) R25.2
  BOTTOM w0.127: v1(24.18,37.97) 25.83,36.32 36.53,36.32 40.97,31.88 42.49,31.88 43.81,33.2 v1(43.81,33.28) 43.81,36.68 47.75,40.61 85.42,40.61 88.6,37.44 93.17,37.44 H5.13
USB_DUPLEX1_DM: length 4.3
  TOP w0.127: R8.2 11.15,37.83 11.33,37.83 11.34,37.85 15.09,37.85 U2.4
USB_DUPLEX1_DP: length 4.2
  TOP w0.127: R9.2 U2.3
USB_SEL: length 7.6
  TOP w0.127: H3.3 19.7,45.22 R18.1 ; R14.1 17.03,45.1 H3.2
  BOTTOM w0.127: H3.2 H3.3
N03414: length 2
  TOP w0.127: R1.2 26.38,2.75 SW1.1
N03782: length 2.3
  TOP w0.127: H2.2 13.78,24.77 R2.1
N03786: length 2.3
  TOP w0.127: H2.3 13.78,26.29 R3.1
N07391: length 1.2
  TOP w0.127: U2.10 19.19,40.41 R7.1
N08245: length 2.3
  TOP w0.127: J1.A5 9.39,39.22 R10.1
N08312: length 6.5
  TOP w0.127: v1(6.95,38.22) J1.A6 9.79,38.22 R9.1 ; J1.B6 6.52,37.22 6.05,37.69 v1(6.05,38.23)
  BOTTOM w0.127: v1(6.05,38.23) 6.05,38.22 v1(6.95,38.22)
N08349: length 5.5
  TOP w0.127: R8.1 9.79,37.72 J1.A7 6.8,37.72 6.5,38.02 6.5,38.41 6.76,38.67 6.77,38.67 6.82,38.72 J1.B7
N09487: length 2.1
  TOP w0.127: J1.B5 9.89,36.22 R11.1
N10980: length 6.5
  TOP w0.127: U2.2 v1(16.23,38.85) ; R14.2 v1(18.02,42.71)
  BOTTOM w0.127: v1(18.02,42.71) 18.02,41.01 16.23,39.22 v1(16.23,38.85)
N11301: length 1.9
  TOP w0.127: U3.10 31.22,39.46 C5.2
N12450: length 2.7
  TOP w0.127: Q1.3 30.09,33.06 R12.2
N12671: length 1.6
  TOP w0.127: Q1.2 26.67,31.61 D3.A
N13607: length 2.2
  TOP w0.127: R13.2 27.52,32.58 28.09,33.15 Q1.1
N13611: length 8.7
  TOP w0.127: v1(31.55,35.05) 31.78,35.28 31.78,37.24 U3.6 ; R13.1 26.77,33.79 26.77,34.65 v1(26.87,34.75)
  BOTTOM w0.127: v1(26.87,34.75) 31.24,34.75 v1(31.55,35.05)
N16887: length 1
  TOP w0.127: D4.A 15.54,11.17 R15.2
N23891: length 10.9
  TOP w0.127: R20.1 10.99,17.99 Q2.2 10.72,15.83 J3.6 J3.3
N23993: length 11.3
  TOP w0.127: R20.2 R19.2 13.87,18 13.87,15.06 15.32,13.61 Q3.3 17.27,12.09 D6.2
N24001: length 2.1
  TOP w0.127: R19.1 12.7,16.29 Q2.1
N25149: length 8.8
  TOP w0.127: SW2.1 20.79,2.76 21.96,3.92 C11.1 18.77,7.38 D6.3
N26855: length 6.9
  TOP w0.127: C12.2 25.01,17.47 Q4.1 23.21,14.49 23.55,14.15 R24.1
N27586: length 2.1
  TOP w0.127: R23.2 22.32,18.99 C12.1
N31213: length 3.3
  TOP w0.127: U2.9 21.12,38.85 22.02,39.75 R26.1
N31217: length 3
  TOP w0.127: U2.7 21.99,37.85 R25.1
N31225: length 3
  TOP w0.127: U2.6 21.84,37.35 R27.1
N31229: length 3.1
  TOP w0.127: U2.8 21.49,38.35 22,38.86 R28.1
N34764: length 2.5
  TOP w0.127: J2.3 36.72,15.44 C18.2 36.7,16.9 C17.2
N39913: length 1.5
  TOP w0.127: Q4.2 25.5,15.28 C20.1
N266131: length 3.8
  TOP w0.127: Q4.3 24.13,18.19 22.5,18.19 21.74,17.42 R22.2

## Copper pours and planes (outline as drawn; the poured copper is in the pictures)
GND on TOP: 35.18,30.1 37.21,30.1 37.46,30.35 37.46,31.62 37.59,31.75 38.1,31.75 38.23,31.62 38.23,29.72 42.8,29.72 43.05,29.46 43.05,26.16 44.96,24.26 44.96,12.45 44.58,12.07 39.37,12.07 39.24,12.19 33.78,12.19 33.4,12.57 33.4,23.24 35.05,24.89 35.05,29.97
GND on TOP: 14.22,37.47 16,37.47 16.51,37.97 16.51,39.5 16,40 16,41.53 16.26,41.78 18.54,41.78 18.8,41.53 18.8,40 18.54,39.75 18.29,39.75 18.03,39.5 18.03,37.97 16.76,36.7 13.97,36.7 13.97,37.21
GND on TOP: 26.92,38.23 28.45,38.23 28.7,37.97 28.7,35.94 29.46,35.94 29.46,40.77 29.21,41.02 28.96,41.02 28.7,40.77 28.7,38.73 27.43,38.73
GND on TOP: 14.22,19.3 15.49,19.3 15.62,19.18 15.62,15.37 15.37,15.11 14.35,15.11 14.22,15.24
GND on TOP: 6.35,41.78 6.98,41.78 7.24,41.53 7.24,40.89 8.51,40.89 8.64,41.02 8.64,42.42 8.25,42.8 6.1,42.8 6.1,42.04
GND on TOP: 9.78,10.67 14.6,10.67 14.86,10.41 14.86,9.02 14.22,8.38 10.79,8.38 9.78,9.4
GND on TOP: 6.35,34.16 6.98,34.16 7.24,34.42 7.24,35.05 8.51,35.05 8.64,34.92 8.64,33.53 8.25,33.15 6.1,33.15 6.1,33.91
GND on TOP: 63.2,26.97 63.2,21.44 63.55,21.08 73.81,21.08 74.47,21.74 74.47,26.9 74.32,27.05 63.27,27.05
GND on INNER1, INNER2: 0.51,47.62 96.65,47.62 96.65,0.51 0.51,0.51
VBAT on TOP: 57.4,34.54 59.69,34.54 59.82,34.42 59.82,33.78 59.69,33.66 57.4,33.66 57.28,33.78 57.28,34.42
VBAT on INNER2: 40,31.88 41.91,31.88 42.93,32.89 45.47,32.89 45.85,32.51 46.23,32.51 48.64,34.92 59.82,34.92 59.94,34.8 59.94,33.66 59.82,33.53 48.77,33.53 46.1,30.86 45.47,30.86 44.96,31.37 42.55,31.37 42.42,31.24 42.42,30.35 40.26,30.35 40,30.61
VBAT_COIN on TOP: 59,43.87 59,38.33 59.36,37.97 69.62,37.97 70.28,38.63 70.28,43.79 70.13,43.94 59.08,43.94
VBUS_4V5 on TOP: 2.79,19.56 4.95,19.56 5.21,19.3 5.21,17.78 4.45,17.02 2.79,17.02 2.54,17.27 2.54,19.3
VBUS_4V5 on INNER2: 2.03,19.18 2.03,17.53 2.67,16.89 10.41,16.89 15.37,21.84 15.37,23.5 14.86,24 6.86,24
VBUS_5V on TOP: 4.32,35.69 4.32,32.77 3.05,31.5 3.05,20.45 3.43,20.07 4.45,20.07 4.83,20.45 4.83,28.07 5.97,29.21 5.97,35.31 5.46,35.81 4.45,35.81
VBUS_5V on TOP: 4.45,40.64 8.13,40.64 8.38,40.39 8.38,40.13 7.24,40.13 6.6,39.5 5.71,39.5 5.59,39.37 5.59,36.83 6.22,36.83 6.35,36.7 6.35,36.32 6.86,35.81 8.38,35.81 8.38,35.43 8.25,35.31 4.32,35.31 4.32,40.51
VBUS_5V on TOP: 29.84,38.1 32.13,38.1 32.26,37.97 32.26,37.85 32.13,37.72 30.73,37.72 30.48,37.47 30.48,35.81 30.35,35.69 29.97,35.69 29.59,35.31 29.59,34.67 29.46,34.54 28.57,34.54 28.57,35.69 28.7,35.81 29.46,35.81 29.72,36.07 29.72,37.97
VDDIO on TOP (solid shape): 39.88,31.57 39.88,29.82 40.03,29.67 41.1,29.67 41.3,29.87 42.04,29.87 42.04,29.69 42.01,29.67 41.27,29.67 41.02,29.41 39.24,29.41 39.14,29.51 39.14,31.62 39.17,31.65 39.8,31.65
VDDIO on TOP: 14.26,46.57 15.76,46.57 15.96,46.37 15.96,42.05 15.69,41.78 15.69,40.31 15.82,40.18 15.82,39.24 14.24,39.24 14.11,39.36 14.11,46.43
VDDIO on TOP: 55.75,39.88 58.17,39.88 58.29,40 58.29,43.81 58.17,43.94 55.75,43.94 55.5,43.69 55.5,40.13
VDDIO on INNER2: 15.24,42.42 74.8,42.42 84.96,32.26 84.96,27.18 87.25,24.89 93.85,24.89 95.76,22.99 95.76,18.8 95.63,18.67 93.98,18.67 93.47,19.18 93.47,22.86 92.84,23.5 84.71,23.5 82.3,25.91 82.3,31.75 74.93,39.12 45.09,39.12 39.88,33.91 39.88,29.21 39.75,29.08 39.62,29.08 38.48,30.23 38.48,37.34 34.54,41.28 16.76,41.28 16.51,41.02 16.51,40.39 15.88,39.75 15.37,39.75 14.86,40.26 14.86,42.04
BT_AVDD on TOP: 35.18,31.14 35.18,33.22 35.76,33.81 39.83,33.81 39.93,33.71 39.93,32.13 39.73,31.93 37.52,31.93 37.26,31.67 37.26,31.14 37.24,31.12 35.2,31.12
BT_AVDD on TOP: 41.33,29.49 42.09,29.49 42.11,29.46 42.11,29.29 42.06,29.24 41.35,29.24 41.05,28.93 40.49,28.93 39.85,28.3 39.85,27.86 39.67,27.69 39.14,27.69 39.01,27.81 39.01,29.11 39.22,29.31 41.15,29.31
BT_AVDD on INNER2: 35.05,33.53 37.85,33.53 38.35,33.02 38.35,30.23 39.88,28.7 39.88,27.69 39.37,27.18 38.73,27.18 34.8,31.12 34.8,33.27
LDOIN on TOP: 13.46,14.61 11.05,14.61 10.67,14.22 10.67,11.56 13.72,11.56 13.84,11.43 13.84,11.05 13.97,10.92 14.73,10.92 14.86,11.05 14.86,13.21
LDOIN on INNER2: 40,30.35 41.27,30.35 42.29,29.34 42.29,26.8 36.65,21.16 36.65,20.55 36.75,20.45 41.78,20.45 45.47,16.76 87.88,16.76 91.06,13.59 95.5,13.59 95.88,13.21 95.88,9.14 95.38,8.64 90.68,8.64 87.76,11.56 11.18,11.56 10.29,12.45 10.29,14.61 19.18,23.5 35.81,23.5 40,27.69
SW on TOP (solid shape): 41.4,33.73 41.4,31.9 41.17,31.67 41.17,31.22 41.33,31.06 42.04,31.06 42.06,31.04 42.06,30.86 41.35,30.86 41.17,31.04 40.59,31.04 40.41,31.22 40.41,33.73 40.46,33.78 41.35,33.78
N07052 on TOP: 55.75,39.67 58.24,39.67 58.32,39.6 58.32,37.9 59,37.21 59,36.42 57.73,36.42 57.63,36.53 56.29,36.53 55.55,37.26 55.55,39.45 55.75,39.65
N23891 on TOP: 6.48,16.26 7.49,17.27 11.18,17.27 11.43,17.02 11.43,15.11 10.67,14.35 9.27,14.35 8.76,13.84 8.76,10.54 8,9.78 6.98,9.78 6.48,10.29
N38093 on TOP: 5.59,20.07 5.59,17.53 4.57,16.51 4.57,9.91 4.7,9.78 5.71,9.78 6.22,10.29 6.22,16.51 7.37,17.65 7.37,20.07 7.24,20.19 5.71,20.19

Small or netless copper shapes (teardrops, artwork), in the pictures only: 2 on TOP

## Text on the board
TOP: JIELI A6321A EVAL. BOARD
Board Geometry/Soldermask Top: JIELI A6321A EVAL. BOARD
Ref Des/Silkscreen Top: SEL->H CH340 | SEL->L USB1 | VDD | SYS | PWR | SGM7227 | USB_SEL | GND | CFG: | CH340 | STATUS | PWR CTRL | BY MCU | TXD | RXD | 2.4GHz RF Bluetooth | A6321a | USB0DP | USB0DM | PB9 | PB7 | PB8 | PA0 | PA1 | PA5 | PA6 | PA7 | PA8 | PB0 | PA9 | PA3 | PA4 | PA2 | PB1 | PB2 | PB3 | USB1DP | USB1DN | PB4 | PB5 | PB6 | VDDIO | LDOIN | POWER | SW | HARD | RESET
XSECTION_CHART: JLC04101H-3313 1.00mm 10% | PCB Stack up  Infos
USER_PART_NUM_TOP: FIGURE | FINISHED_SIZE | 8.0 | 25.591 | 40.0 | 49.0 | 59.0 | 23.618 | 39.37x39.37 | 55.118x25.591 | 59.059x35.429 | 62.988x51.181 | 67.728x25.591 | DRILL CHART: TOP to BOTTOM | ALL UNITS ARE IN MILS | ROTATION | - | 0.000 | 90.000 | PLATED | NON-PLATED | QTY | 263 | 4 | 2 | 40 | 1 | 6
